# Altium PCB OSD19001_BRK_X2.PcbDoc (part 2 of 2)
Units mil, origin at the board's own origin, x right, y up, seen from the top; angles counter-clockwise.
Board outline 1800 x 3000 mil, 4 copper layers (Top Layer, L2 PLANE, L3 PLANE, Bottom Layer), stack 59.2 mil thick; 162 components, 155 nets, 549 pads, 163 vias.
Unrouted connection lines stored in the file: 111.
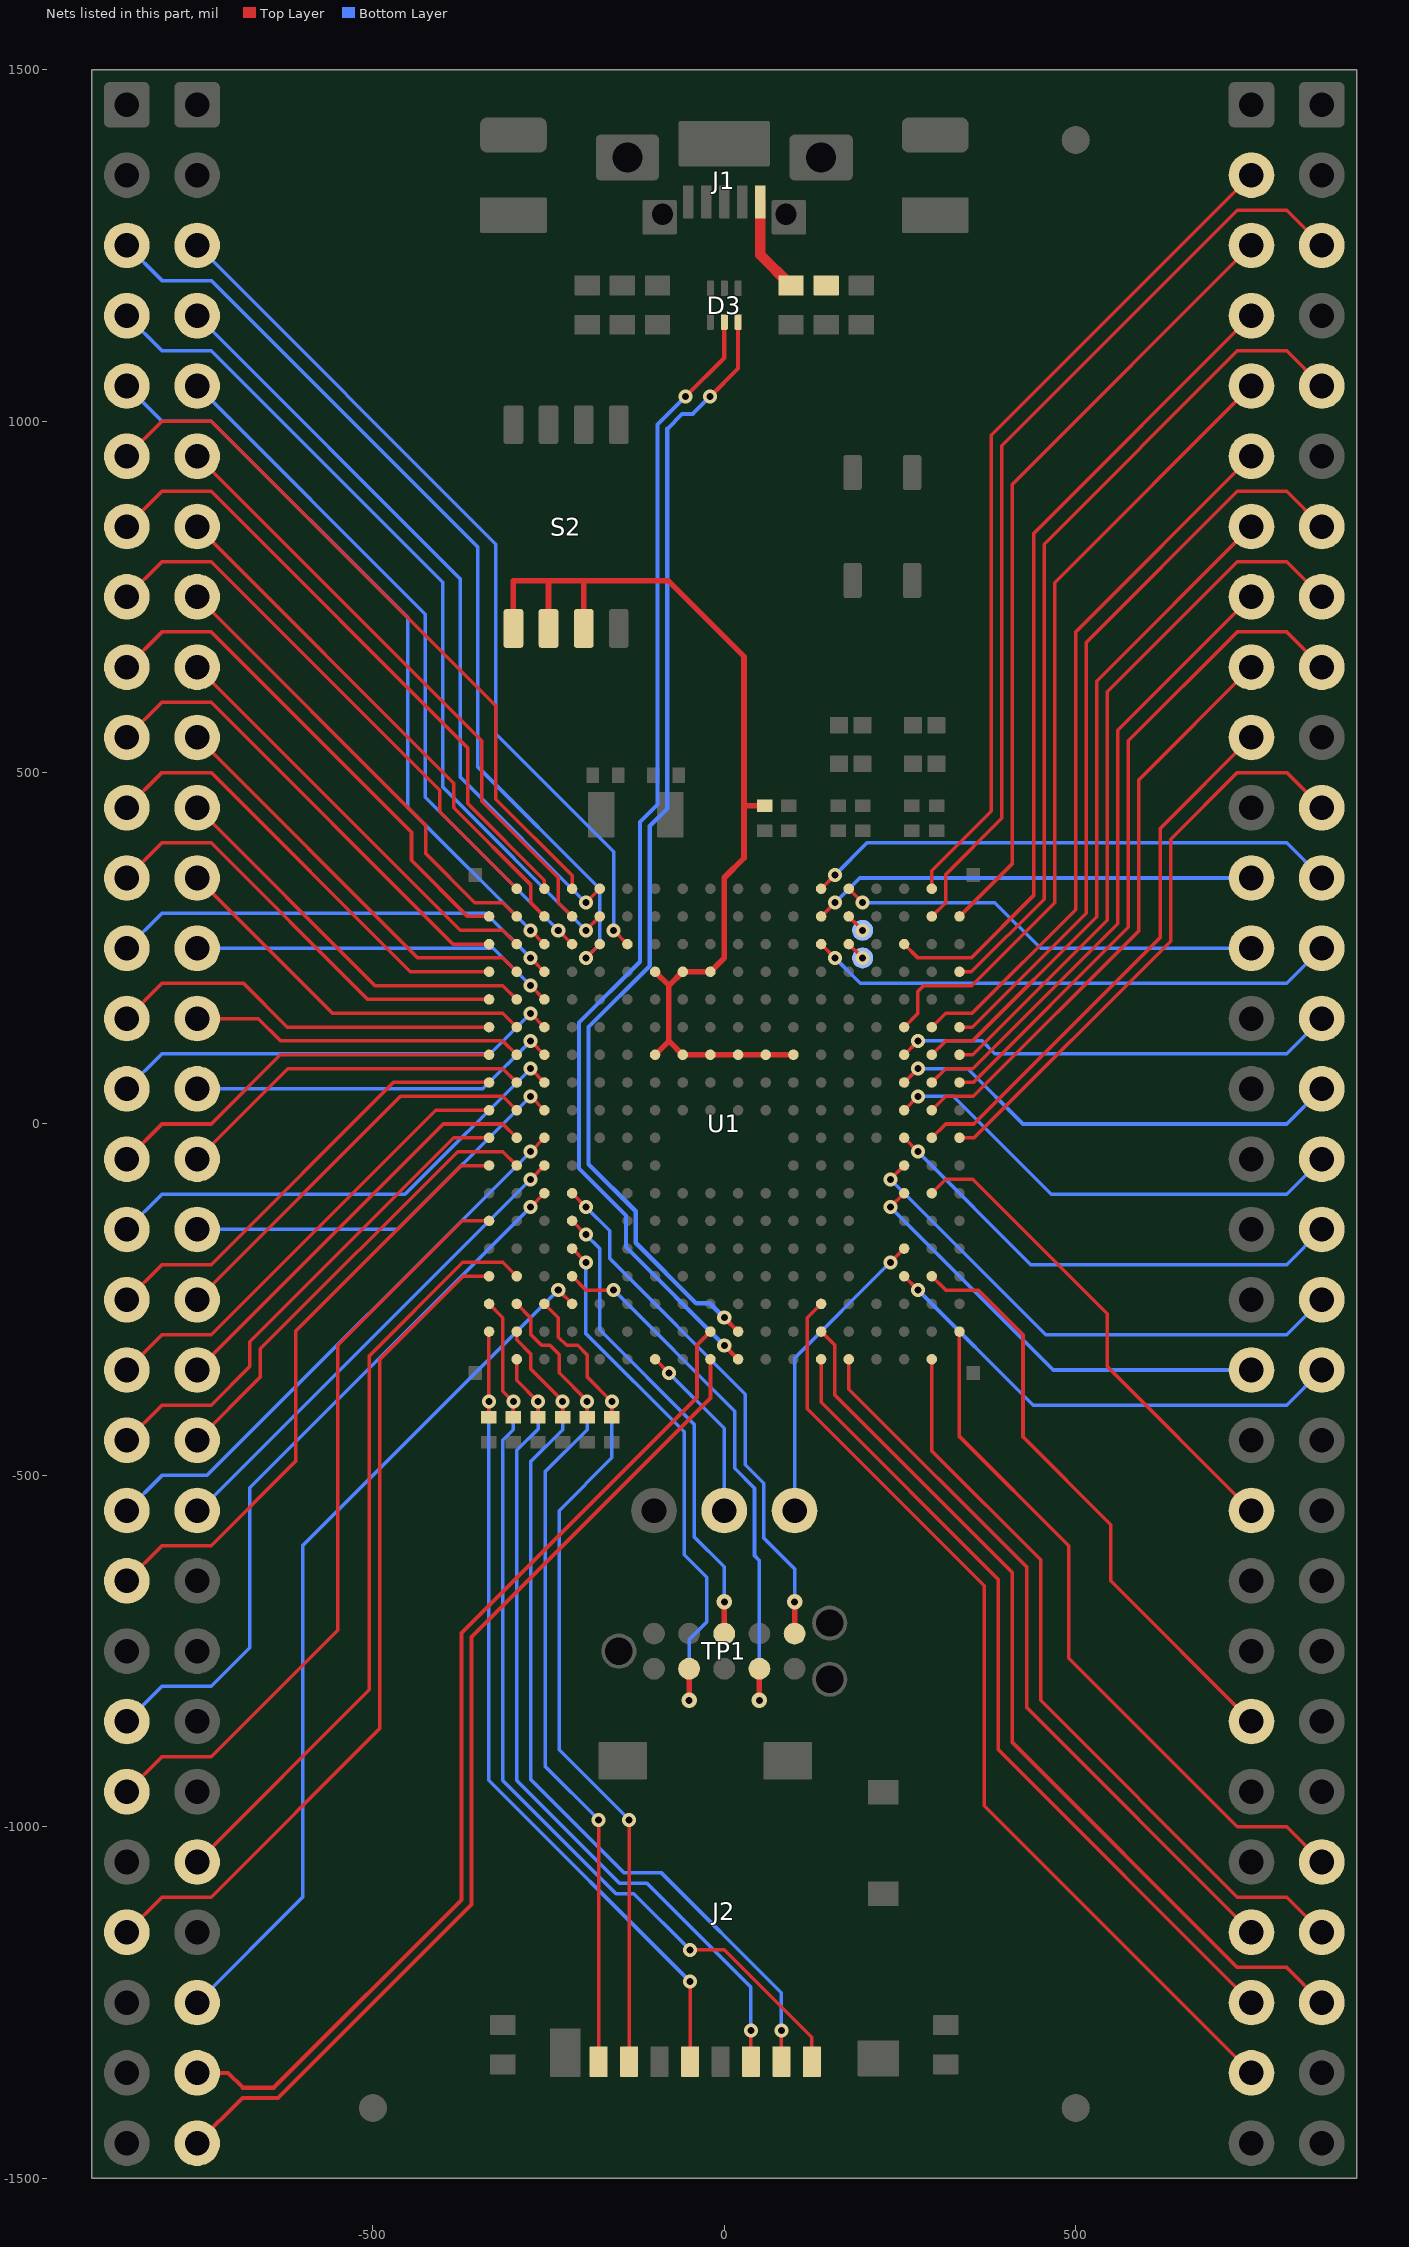
[diagram p4: the nets of this part, all layers, seen from the top]

## Via types
v1: diameter 20, hole 10, Top Layer to Bottom Layer, 130 vias
v2: diameter 25, hole 15, Top Layer to Bottom Layer, 26 vias
v3: diameter 22, hole 10, Top Layer to Bottom Layer, 7 vias

## Nets (pads, with @x,y where several pads share a name; then routed paths per layer and width w, separated by ;. In a path a pad name is that pad's centre, name@x,y a point inside that pad or via, vN(x,y) a via of type N, cw(c..) or ccw(c..) an arc to the next point about the centre after c; other vN are vias at no path point) (continued)
PB15: PA25.1 U1.V13 | length 1089
  Top Layer w5: PA25.1@-850,-950 -800,-900 -730,-900 -550,-720 -550,-315 -372.8,-137.8 U1.V13@-334.65,-137.8
PC0: PD26.1 U1.A17 | length 1009.2
  Top Layer w5: U1.A17@334.65,-295.28 334.65,-444.65 490,-600 490,-760 730,-1000 800,-1000 PD26.1@850,-1050
PC1: PC24.1 U1.B15 | length 848.9
  Top Layer w5: U1.B15@295.28,-216.54 314.96,-236.22 361.22,-236.22 425,-300 425,-445 550,-570 550,-650 PC24.1@750,-850
PC2: PD14.1 U1.C7 | length 630.5
  Top Layer w5: U1.C7@255.91,98.43 v1(275.59,118.11)
  Bottom Layer w5: v1(275.59,118.11) 366.89,118.11 385,100 800,100 PD14.1@850,150
PC3: PC06.1 U1.B6 | length 1022.5
  Top Layer w5: U1.B6@295.28,137.8 314.96,157.48 352.48,157.48 500,305 500,700 PC06.1@750,950
PC4: PC21.1 U1.B12 | length 702
  Top Layer w5: U1.B12@295.28,-98.43 314.96,-78.74 353.74,-78.74 545,-270 545,-345 PC21.1@750,-550
PC5: PC19.1 U1.C12 | length 637.7
  Top Layer w5: v1(236.22,-118.11) U1.C12@255.91,-98.43
  Bottom Layer w5: v1(236.22,-118.11) 468.11,-350 PC19.1@750,-350
PC7: PB28.1 U1.R16 | length 1254.4
  Top Layer w5: v1(-236.22,-236.22) U1.R16@-216.54,-255.91
  Bottom Layer w5: PB28.1@-750,-1250 -600,-1100 -600,-600 v1(-236.22,-236.22)
PD0: PA22.1 U1.V11 | length 868.5
  Top Layer w5: PA22.1@-850,-650 -800,-600 -730,-600 -610,-480 -610,-295 -374.06,-59.06 U1.V11@-334.65,-59.06
PD1: PB20.1 U1.U11 | length 656.4
  Top Layer w5: PB20.1@-750,-450 -660,-360 -660,-320 -379.37,-39.37 -314.96,-39.37 U1.U11@-295.28,-59.06
PD3: PB21.1 U1.T11 | length 694.3
  Top Layer w5: v1(-275.59,-78.74) U1.T11@-255.91,-59.06
  Bottom Layer w5: PB21.1@-746.85,-550 v1(-275.59,-78.74)
PD4: PA20.1 U1.V10 | length 714.1
  Top Layer w5: PA20.1@-850,-450 -800,-400 -730,-400 -675,-345 -675,-310 -384.68,-19.69 U1.V10@-334.65,-19.69
PD5: PB19.1 U1.U10 | length 607.9
  Top Layer w5: PB19.1@-750,-350 -400,0 -314.96,0 U1.U10@-295.28,-19.69
PD6: PA21.1 U1.T10 | length 813.8
  Top Layer w5: v1(-275.59,-39.37) U1.T10@-255.91,-19.69
  Bottom Layer w5: PA21.1@-850,-550 -800,-500 -736.22,-500 v1(-275.59,-39.37)
PD7: PB18.1 U1.U9 | length 582.7
  Top Layer w5: PB18.1@-750,-250 -460.63,39.37 -314.96,39.37 U1.U9@-295.28,19.69
PD8: PD03.1 U1.B2 | length 1325.5
  Top Layer w5: U1.B2@295.28,295.28 314.96,314.96 314.96,354.96 395,435 395,965 730,1300 800,1300 PD03.1@850,1250
PD9: PC02.1 U1.B1 | length 1203.7
  Top Layer w5: U1.B1@295.28,334.65 295.28,360.28 380,445 380,980 PC02.1@750,1350
PD10: PA14.1 U1.V6 | length 561.8
  Top Layer w5: PA14.1@-850,150 -800,200 -684,200 -621.8,137.8 U1.V6@-334.65,137.8
PD11: PC27.1 U1.E18 | length 1052.6
  Top Layer w5: U1.E18@177.17,-334.65 177.17,-377.17 430,-630 430,-830 PC27.1@750,-1150
PD12: PC29.1 U1.F16 | length 1364
  Top Layer w5: U1.F16@137.8,-255.91 118.11,-275.59 118.11,-405.11 370,-657 370,-970 PC29.1@750,-1350
PD13: PD28.1 U1.F17 | length 1290.7
  Top Layer w5: U1.F17@137.8,-295.28 157.48,-314.96 157.48,-385.83 410,-638.35 410,-880 730,-1200 800,-1200 PD28.1@850,-1250
PD14: PC04.1 U1.C3 | length 1182.4
  Top Layer w5: U1.C3@255.91,255.91 275.59,236.22 351.22,236.22 440,325 440,840 PC04.1@750,1150
PD15: PC03.1 U1.A2 | length 1126.8
  Top Layer w5: U1.A2@334.65,295.28 410,370.63 410,910 PC03.1@750,1250
PE0: PB14.1 U1.U7 | length 476.1
  Top Layer w5: PB14.1@-750,150 -663,150 -631.11,118.11 -314.96,118.11 U1.U7@-295.28,98.43
PE1: PB15.1 U1.T7 | length 530.5
  Top Layer w5: v1(-275.59,118.11) U1.T7@-255.91,98.43
  Bottom Layer w5: PB15.1@-750,50 -343.7,50 v1(-275.59,118.11)
PE2: PD07.1 U1.A6 | length 1077.3
  Top Layer w5: U1.A6@334.65,137.8 352.8,137.8 515,300 515,685 730,900 800,900 PD07.1@850,850
PE3: PA24.1 U1.T12 | length 1038.7
  Top Layer w5: v1(-275.59,-118.11) U1.T12@-255.91,-98.43
  Bottom Layer w5: PA24.1@-850,-850 -800,-800 -730,-800 -675,-745 -675,-517.52 v1(-275.59,-118.11)
PE5: PA27.1 U1.V15 | length 1209.5
  Top Layer w5: PA27.1@-850,-1150 -800,-1100 -730,-1100 -490,-860 -490,-335 -371.54,-216.54 U1.V15@-334.65,-216.54
PE6: PB17.1 U1.T9 | length 580.7
  Top Layer w5: v1(-275.59,39.37) U1.T9@-255.91,19.69
  Bottom Layer w5: PB17.1@-750,-150 -464.96,-150 v1(-275.59,39.37)
PE11: PA12.1 U1.V5 | length 628.4
  Top Layer w5: PA12.1@-850,350 -800,400 -730,400 -507.17,177.17 U1.V5@-334.65,177.17
PE12: PB11.1 U1.U5 | length 567.7
  Top Layer w5: PB11.1@-750,450 -496.85,196.85 -314.96,196.85 U1.U5@-295.28,177.17
PE13: PB13.1 U1.T5 | length 524.3
  Top Layer w5: v1(-275.59,196.85) U1.T5@-255.91,177.17
  Bottom Layer w5: PB13.1@-750,250 -328.74,250 v1(-275.59,196.85)
PE14: PA11.1 U1.V4 | length 653.5
  Top Layer w5: PA11.1@-850,450 -800,500 -730,500 -446.54,216.54 U1.V4@-334.65,216.54
PE15: PB10.1 U1.U4 | length 592.8
  Top Layer w5: PB10.1@-750,550 -436.22,236.22 -314.96,236.22 U1.U4@-295.28,216.54
PF0: PB16.1 U1.U8 | length 516.2
  Top Layer w5: PB16.1@-750,-50 -621.26,78.74 -314.96,78.74 U1.U8@-295.28,59.06
PF1: PA18.1 U1.V8 | length 643.4
  Top Layer w5: PA18.1@-850,-250 -800,-200 -730,-200 -470.94,59.06 U1.V8@-334.65,59.06
PF3: PC05.1 U1.C6 | length 1156.9
  Top Layer w5: U1.C6@255.91,137.8 275.59,157.48 275.59,188.98 283.46,196.85 351.85,196.85 470,315 470,770 PC05.1@750,1050
PF4: PA16.1 U1.V7 | length 576.8
  Top Layer w5: PA16.1@-850,-50 -800,0 -730,0 -631.57,98.43 U1.V7@-334.65,98.43
PF5: PA17.1 U1.T8 | length 697
  Top Layer w5: v1(-275.59,78.74) U1.T8@-255.91,59.06
  Bottom Layer w5: PA17.1@-850,-150 -800,-100 -454.33,-100 v1(-275.59,78.74)
PF6: PC28.1 U1.F18 | length 1168.9
  Top Layer w5: U1.F18@137.8,-334.65 137.8,-395.8 390,-648 390,-890 PC28.1@750,-1250
PF11: PD27.1 U1.B18 | length 1086.1
  Top Layer w5: U1.B18@295.28,-334.65 295.28,-465.28 450,-620 450,-820 730,-1100 800,-1100 PD27.1@850,-1150
PF12: PD18.1 U1.C11 | length 754
  Top Layer w5: v1(236.22,-78.74) U1.C11@255.91,-59.06
  Bottom Layer w5: v1(236.22,-78.74) 457.48,-300 800,-300 PD18.1@850,-250
PF13: PD11.1 U1.A10 | length 836.3
  Top Layer w5: U1.A10@334.65,-19.69 355.31,-19.69 635,260 635,405 730,500 800,500 PD11.1@850,450
PF14: PC10.1 U1.B10 | length 781.5
  Top Layer w5: U1.B10@295.28,-19.69 314.96,0 355,0 620,265 620,420 PC10.1@750,550
PF15: PD17.1 U1.C10 | length 689.5
  Top Layer w5: U1.C10@255.91,-19.69 v1(275.59,-39.37)
  Bottom Layer w5: v1(275.59,-39.37) 436.22,-200 800,-200 PD17.1@850,-150
PG0: PD15.1 U1.C8 | length 655.6
  Top Layer w5: U1.C8@255.91,59.06 v1(275.59,78.74)
  Bottom Layer w5: v1(275.59,78.74) 346.26,78.74 425,0 800,0 PD15.1@850,50
PG1: PC08.1 U1.B8 | length 902
  Top Layer w5: U1.B8@295.28,59.06 314.96,78.74 353.74,78.74 560,285 560,560 PC08.1@750,750
PG2: PD09.1 U1.A8 | length 956.8
  Top Layer w5: U1.A8@334.65,59.06 354.06,59.06 575,280 575,545 730,700 800,700 PD09.1@850,650
PG3: PD16.1 U1.C9 | length 680.7
  Top Layer w5: U1.C9@255.91,19.69 v1(275.59,39.37)
  Bottom Layer w5: v1(275.59,39.37) 325.63,39.37 465,-100 800,-100 PD16.1@850,-50
PG4: PC09.1 U1.B9 | length 841.8
  Top Layer w5: U1.B9@295.28,19.69 314.96,39.37 354.37,39.37 590,275 590,490 PC09.1@750,650
PG5: PD19.1 U1.C15 | length 690.8
  Top Layer w5: U1.C15@255.91,-216.54 v1(275.59,-236.22)
  Bottom Layer w5: v1(275.59,-236.22) 439.37,-400 800,-400 PD19.1@850,-350
PG6: PB26.1 U1.U15 | length 1094.5
  Top Layer w5: PB26.1@-750,-1050 -505,-805 -505,-330 -371.85,-196.85 -314.96,-196.85 U1.U15@-295.28,-216.54
PG12: PD05.1 U1.A4 | length 1197.8
  Top Layer w5: U1.A4@334.65,216.54 351.54,216.54 455,320 455,825 730,1100 800,1100 PD05.1@850,1050
PG13: PC07.1 U1.B7 | length 962.3
  Top Layer w5: U1.B7@295.28,98.43 314.96,118.11 353.11,118.11 530,295 530,630 PC07.1@750,850
PG14: PD08.1 U1.A7 | length 1017
  Top Layer w5: U1.A7@334.65,98.43 353.43,98.43 545,290 545,615 730,800 800,800 PD08.1@850,750
PG15: PA19.1 U1.V9 | length 668.5
  Top Layer w5: PA19.1@-850,-350 -800,-300 -730,-300 -410.32,19.68 U1.V9@-334.65,19.69
PH4: PB12.1 U1.U6 | length 542.6
  Top Layer w5: PB12.1@-750,350 -557.48,157.48 -314.96,157.48 U1.U6@-295.28,137.8
PH5: PA15.1 U1.T6 | length 646.8
  Top Layer w5: v1(-275.59,157.48) U1.T6@-255.91,137.8
  Bottom Layer w5: PA15.1@-850,50 -800,100 -333.07,100 v1(-275.59,157.48)
PH8: PA13.1 U1.T4 | length 649.4
  Top Layer w5: v1(-275.59,236.22) U1.T4@-255.91,216.54
  Bottom Layer w5: PA13.1@-850,250 -800,300 -339.37,300 v1(-275.59,236.22)
PH9: PA10.1 U1.V3 | length 678.6
  Top Layer w5: PA10.1@-850,550 -800,600 -730,600 -385.91,255.91 U1.V3@-334.65,255.91
PH10: PB09.1 U1.U3 | length 618
  Top Layer w5: PB09.1@-750,650 -375.59,275.59 -314.96,275.59 U1.U3@-295.28,255.91
PH11: PA09.1 U1.V2 | length 727.1
  Top Layer w5: PA09.1@-850,650 -800,700 -730,700 -445,415 -445,375 -365.28,295.28 U1.V2@-334.65,295.28
PH12: PB08.1 U1.U2 | length 666.5
  Top Layer w5: PB08.1@-750,750 -425,425 -425,385 -354.96,314.96 -314.96,314.96 U1.U2@-295.28,295.28
PH13: PA08.1 U1.U1 | length 786.1
  Top Layer w5: PA08.1@-850,750 -800,800 -730,800 -405,475 -405,444.37 U1.U1@-295.28,334.65
PH14: PA07.1 U1.T1 | length 902.4
  Top Layer w5: PA07.1@-850,850 -800,900 -730,900 -365,535 -365,456 -255.91,346.91 U1.T1@-255.91,334.65
PH15: PB07.1 U1.T2 | length 759.4
  Top Layer w5: PB07.1@-750,850 -385,485 -385,450 -275,340 -275,314.37 U1.T2@-255.91,295.28
PI0: PA05.1 U1.T3 | length 1081.2
  Top Layer w5: v1(-275.59,275.59) U1.T3@-255.91,255.91
  Bottom Layer w5: PA05.1@-850,1050 -800,1000 -730,1000 -450,720 -450,450 v1(-275.59,275.59)
PI1: PA06.1 U1.R1 | length 1018.7
  Top Layer w5: PA06.1@-850,950 -800,1000 -730,1000 -325,595 -325,462 -216.54,353.54 U1.R1@-216.54,334.65
PI2: PB06.1 U1.R2 | length 875.7
  Top Layer w5: PB06.1@-750,950 -345,545 -345,459 -236.22,350.22 -236.22,314.96 U1.R2@-216.54,295.28
PI3: PB05.1 U1.R3 | length 1015.1
  Top Layer w5: v1(-236.22,275.59) U1.R3@-216.54,255.91
  Bottom Layer w5: PB05.1@-750,1050 -425.32,725.31 -425.32,464.68 v1(-236.22,275.59)
PI4: PB04.1 U1.P1 | length 1092
  Top Layer w5: v1(-196.85,314.96) U1.P1@-177.17,334.65
  Bottom Layer w5: PB04.1@-750,1150 -375.94,775.94 -375.94,494.06 v1(-196.85,314.96)
PI5: PA04.1 U1.P2 | length 1213.8
  Top Layer w5: v1(-196.85,275.59) U1.P2@-177.17,295.28
  Bottom Layer w5: PA04.1@-850,1150 -800,1100 -730,1100 -400.63,770.63 -400.63,479.37 v1(-196.85,275.59)
PI6: PA03.1 U1.P3 | length 1369.5
  Top Layer w5: v1(-196.85,236.22) U1.P3@-177.17,255.91
  Bottom Layer w5: PA03.1@-850,1250 -800,1200 -730,1200 -350.39,820.39 -350.39,507.87 -177.17,334.65 -177.17,255.91 v1(-196.85,236.22)
PI7: PB03.1 U1.N3 | length 1247.7
  Top Layer w5: v1(-157.48,275.59) U1.N3@-137.8,255.91
  Bottom Layer w5: PB03.1@-750,1250 -325,825 -325,555 -157.48,387.48 v1(-157.48,275.59)
PZ0: PD12.1 U1.F1 | length 760
  Top Layer w5: U1.F1@137.8,334.65 v1(157.48,354.33)
  Bottom Layer w5: v1(157.48,354.33) 203.15,400 800,400 PD12.1@850,350
PZ1: PC12.1 U1.F2 | length 634.9
  Top Layer w5: U1.F2@137.8,295.28 v1(157.48,314.96)
  Bottom Layer w5: v1(157.48,314.96) 192.52,350 PC12.1@750,350
PZ2: PD13.1 U1.F3 | length 756.1
  Top Layer w5: U1.F3@137.8,255.91 v1(157.48,236.22)
  Bottom Layer w5: v1(157.48,236.22) 193.7,200 800,200 PD13.1@850,250
PZ3: PC13.1 U1.E1 | length 607.9
  Top Layer w5: U1.E1@177.17,334.65 v1(196.85,314.96)
  Bottom Layer w5: v1(196.85,314.96) 385.04,314.96 450,250 PC13.1@750,250
PZ4: PZ4.1 U1.E2 | length 27.8
  Top Layer w5: U1.E2@177.17,295.28 v1(196.85,275.59)
PZ5: PZ5.1 U1.E3 | length 27.8
  Top Layer w5: U1.E3@177.17,255.91 v1(196.85,236.22)
SDMMC1_CK: J2.5 R5.1 U1.V17 | length 1179.5
  Top Layer w5: R5.1@-335,-417 v1(-335,-395) -335,-295.63 U1.V17@-334.65,-295.28 ; J2.5@-48.72,-1334.07 v1(-48.72,-1220)
  Bottom Layer w5: v1(-335,-395) -335,-933.72 v1(-48.72,-1220)
SDMMC1_CMD: J2.3 R6.1 U1.U18 | length 1207.1
  Top Layer w5: U1.U18@-295.28,-334.65 -295.28,-364.72 v1(-265,-395) R6.1@-265,-417 ; J2.3@37.89,-1334.07 v1(37.89,-1290)
  Bottom Layer w5: v1(-265,-395) -265,-434.29 -295,-464.29 -295,-934 -149,-1080 -110,-1080 37.89,-1227.89 v1(37.89,-1290)
SDMMC1_D0: J2.7 R1.1 U1.T16 | length 1221.5
  Top Layer w5: U1.T16@-255.91,-255.91 -236.22,-275.59 -236.22,-303.15 -224.37,-315 -208.62,-315 -195,-328.62 -195,-360 v1(-160,-395) R1.1@-160,-417 ; J2.7@-135.33,-1334.07 v1(-135.33,-990)
  Bottom Layer w5: v1(-160,-395) -160,-475 -235,-550 -235,-890.33 v1(-135.33,-990)
SDMMC1_D1: J2.8 R2.1 U1.U16 | length 1205.2
  Top Layer w5: U1.U16@-295.28,-255.91 -275,-276.18 -275,-300 -260,-315 -247.99,-315 -235,-327.99 -235,-354.06 -195,-394.06 v1(-195,-395) R2.1@-195,-417 ; J2.8@-178.64,-1334.07 v1(-178.64,-990)
  Bottom Layer w5: v1(-195,-395) -195,-435 -255,-495 -255,-913.64 v1(-178.64,-990)
SDMMC1_D2: J2.1 R3.1 U1.V16 | length 1347
  Top Layer w5: U1.V16@-334.65,-255.91 -315,-275.55 -315,-380 v1(-300,-395) R3.1@-300,-417 ; v1@-50,-1175 v1@-49.36,-1174.36 ; v1(-48.72,-1175) 0,-1175 124.51,-1299.51 J2.1@124.51,-1334.07
  Bottom Layer w5: v1(-300,-395) -300,-435 -315,-450 -315,-934 -154,-1095 -128.72,-1095 v1(-48.72,-1175)
SDMMC1_D3: J2.2 R4.1 U1.U17 | length 1285.1
  Top Layer w5: U1.U17@-295.28,-295.28 -295.28,-307.09 -275,-327.36 -275,-349.06 -230,-394.06 v1(-230,-395) R4.1@-230,-417 ; J2.2@81.2,-1334.07 v1(81.2,-1290)
  Bottom Layer w5: v1(-230,-395) -230,-435 -275,-480 -275,-933 -143,-1065 -90,-1065 81.2,-1236.2 v1(81.2,-1290)
SWCLK/TCK: TP1.4 U1.R15 | length 781.9
  Top Layer w5: U1.R15@-216.54,-216.54 -196.85,-236.22 v1(-157.48,-236.22)
  Top Layer w8: v3(50,-820) TP1.4@50,-775
  Bottom Layer w5: v1(-157.48,-236.22) 15,-408.7 15,-490 43,-518 43,-614 50,-621 v3(50,-820)
SWDIO/TMS: TP1.2 U1.R14 | length 777.5
  Top Layer w5: U1.R14@-216.54,-177.17 v1(-196.85,-196.85)
  Top Layer w8: v3(-50,-820) TP1.2@-50,-775
  Bottom Layer w5: v1(-196.85,-196.85) -196.85,-298.15 -57,-438 -57,-613 -25,-645 -25,-708.46 -50,-733.46 v3(-50,-820)
SWO/TDO: TP1.6 U1.R12 | length 757.7
  Top Layer w5: U1.R12@-216.54,-98.43 v1(-196.85,-118.11)
  Top Layer w8: TP1.6@100,-725 v3(100,-680)
  Bottom Layer w5: v1(-196.85,-118.11) -163,-151.96 -163,-191.33 30,-384.33 30,-485 56,-511 56,-589 100,-633 v3(100,-680)
TDI: TP1.8 U1.R13 | length 676.9
  Top Layer w5: U1.R13@-216.54,-137.8 v1(-196.85,-157.48)
  Top Layer w8: TP1.8@0,-725 v3(0,-680)
  Bottom Layer w5: v1(-196.85,-157.48) -177.17,-177.17 -177.17,-292.83 -43,-427 -43,-587 0,-630 v3(0,-680)
UART4_RX: PRXD.1 U1.M18 | length 256.1
  Top Layer w5: U1.M18@-98.43,-334.65 v1(-78.74,-354.33)
  Bottom Layer w5: v1(-78.74,-354.33) 0,-433.07 PRXD.1@0,-550
UART4_TX: PTXD.1 U1.C14 | length 437.4
  Top Layer w5: v1(236.22,-196.85) U1.C14@255.91,-177.17
  Bottom Layer w5: PTXD.1@100,-550 100,-333.07 v1(236.22,-196.85)
USB1_D_N: PB30.1 U1.K18 | length 1447.6
  Top Layer w6: PB30.1@-750,-1450 -685.55,-1385.55 -634.75,-1385.55 -359.69,-1110.5 -359.69,-729.68 -19.69,-389.67 U1.K18@-19.69,-334.65
USB1_D_P: PB29.1 U1.K17 | length 1450.8
  Top Layer w6: PB29.1@-750,-1350 -705.97,-1350 -684.97,-1371 -641,-1371 -374,-1104 -374,-724 -39,-389 -39,-314.59 U1.K17@-19.69,-295.28
USB2_D_N: D3.6 U1.J17 | length 1628.8
  Top Layer w6: v1(-20,1035) 19.68,1074.68 D3.6@19.68,1141.38 ; v1(0,-275.59) U1.J17@19.69,-295.28
  Bottom Layer w6: v1@-23,1032 -45,1010 -60,1010 -81,989 -81,449 -106,424 -106,225 -193,138 -193,-57.2 -126,-124.2 -126,-169 -40,-255 -20.59,-255 v1(0,-275.59)
USB2_D_P: D3.5 U1.J18 | length 1654.9
  Top Layer w6: v1(-55,1035) 0,1090 D3.5@0,1140.98 ; v1(0,-314.96) U1.J18@19.69,-334.65
  Bottom Layer w6: v1(-55,1035) -95,995 -95,454.8 -120,429.8 -120,230.8 -206.54,144.26 -206.54,-63.46 -140,-130 -140,-174.96 v1(0,-314.96)
VDDI: R7.2 S2.1 S2.2 S2.3 U1.G7 U1.H7 U1.J7 U1.K4 U1.K7 U1.L4 U1.L7 U1.M4 U1.M7 | length 1461.2
  Top Layer w8: S2.1@-300,705 -300,773 -250,773 ; S2.2@-250,705 -250,773 ; S2.3@-200,705 -200,773 ; U1.M7@-98.43,98.43 -78.74,118.11 ; U1.M4@-98.43,216.54 -78.74,196.85 ; R7.2@57.31,453 28,453 ; U1.G7@98.43,98.43 U1.H7@59.06,98.43 U1.J7@19.69,98.43 U1.K7@-19.69,98.43 U1.L7@-59.06,98.43 -78.74,118.11 ; -250,773 -200,773 ; -200,773 -80,773 28,665 28,453 ; -78.74,118.11 -78.74,196.85 ; -78.74,196.85 U1.L4@-59.06,216.54 U1.K4@-19.69,216.54 0,236.22 0,350.39 28,378.39 28,453
VWALLP: C5.2 J1.1 L1.1 | length 137.2
  Top Layer w15: J1.1@51.18,1312.01 51.18,1236.82 C5.2@95,1193
pads on no net: FID1.1 FID2.1 FID3.1 TP1.0 TP1.5 TP1.7 U1.0 U1.A3 U1.B4 U1.B5 U1.B13 U1.C4 U1.C5 U1.C13 U1.C18 U1.D5 U1.D6 U1.D7 U1.D8 U1.D9 U1.D10 U1.D16 U1.D17 U1.D18 U1.E16 U1.E17 U1.G8 U1.G16 U1.G17 U1.G18 U1.H4 U1.H12 U1.H16 U1.J2 U1.J4 U1.J12 U1.K6 U1.K8 U1.K9 U1.K12 U1.L3 U1.L6 U1.L12 U1.L16 U1.L17 U1.L18 U1.M6 U1.M16 U1.M17 U1.N4 U1.N16 U1.N17 U1.N18 U1.P9 U1.P10 U1.P16 U1.P17 U1.P18 U1.R4 U1.R5 U1.R6 U1.R7 U1.R8 U1.R9 U1.R10 U1.R17 U1.R18 U1.T17 U1.T18
copper on no net: | length 0

## Polygon pours and split planes (outlines as drawn)
GND on Top Layer "Top Layer-GND" (solid, pour order 0): -233,360 -15.75,360 -15.75,550 -233,550
GND on L2 PLANE (split plane): 884.93,-1484.93 -884.93,-1484.93 -884.93,1484.93 884.93,1484.93
+3.3V on L3 PLANE (split plane): 884.93,-1484.93 -884.93,-1484.93 -884.93,1389.91 -704.18,1389.91 -342.13,1027.87 -340.04,1026.26 -337.61,1025.26 -335,1024.91 -5.09,1024.91 -5.09,349.33 -4.74,346.72 -3.73,344.29 -2.13,342.2 68.65,271.41 68.65,167.57 -118.11,167.57 -120.72,167.22 -123.15,166.22 -125.24,164.61 -126.85,162.52 -127.85,160.09 -128.2,157.48 -128.2,0 -127.85,-2.61 -126.85,-5.04 -125.24,-7.13 -123.15,-8.74 -120.72,-9.74 -118.11,-10.09 236.22,-10.09 238.83,-9.74 241.26,-8.74 243.35,-7.13 244.96,-5.04 245.96,-2.61 246.31,0 246.31,622.04 382.13,757.87 383.74,759.96 384.74,762.39 385.09,765 385.09,1484.93 884.93,1484.93
+VIN on L3 PLANE (split plane): 364.91,769.18 229.09,633.35 227.49,631.26 226.48,628.83 226.13,626.22 226.13,10.09 -108.02,10.09 -108.02,147.39 78.74,147.39 81.35,147.74 83.78,148.75 85.87,150.35 87.48,152.44 88.07,153.86 88.48,154.87 88.83,157.48 88.83,275.59 88.48,278.2 87.98,279.42 87.48,280.63 85.87,282.72 15.09,353.51 15.09,1035 14.74,1037.61 13.74,1040.04 12.13,1042.13 10.04,1043.74 7.61,1044.74 5,1045.09 -330.82,1045.09 -692.87,1407.13 -694.96,1408.74 -697.39,1409.74 -700,1410.09 -884.93,1410.09 -884.93,1484.93 364.91,1484.93

## Other copper
Top Layer:
  rectangle net NetC10_2: -169,1175 -67,1287
  region net +VIN: -229,1095 -229,1325 -370,1325 -370,1095
  region net +VIN: -171,1155 -370,1155 -370,1095 -171,1095
  rectangle net +VIN: 121,1095 370,1155
  region net +VIN: 370,1095 370,1325 229,1325 229,1095
  rectangle net VWALLP: 43.7,1175 168.7,1245
  rectangle net GND: -58.7,1095 -13,1276
  region net NetC10_2: -67,1259 -67,1430 -190,1430 -190,1259
  region net NetC10_2: 190,1259 190,1430 67,1430 67,1259
  region net NetC10_2: 116,1430 -140,1430 -140,1350 116,1350
  text ".layer_Name" at -1007.67,2144.26 h125
Bottom Layer:
  text ".layer_Name" at -1065,1820 h125
L2 PLANE (plane layer: these items are gaps in the copper):
  text ".Layer_Name" at -1002.5,2034.5 h125
L3 PLANE (plane layer: these items are gaps in the copper):
  lines w20: -900,1400 -700,1400 -335,1035 5,1035 5,349.33 78.74,275.59 78.74,157.48 ; 375,1500 375,765 236.22,626.22 236.22,0 -118.11,0 -118.11,157.48 78.74,157.48 ; 78.74,157.48 78.74,157.48
  text ".Layer_Name" at -997.5,1924.5 h125

## Silkscreen, mask and mechanical layers (free items; w line width, h text height)
Top Overlay:
  drawing of 2511 lines, arcs and shapes, not listed
  text ".layer_Name" at -285,2019.5 h125
  text "A" at -850,1340 h45
  text "B" at -750,1340 h45
  text "C" at 650,1340 h45
  text "D" at 750,1340 h45
  text "RESET" at 150,736 h45 r90
  text "BOOT" at -355,735 h45 r90
  text "1" at -235,656 h45 r90
  text "0" at -286,653 h45 r90
  text "2" at -185,652 h45 r90
  text "WP" at -135,608 h45 r90
  text "OSD32MP1-BRK              VER 1" at 450,-355 h55 r90
  text "OCTAVOSYSTEMS.COM" at 520,-355 h60 r90
  text "GND" at -85,-500 h45 r90
  text "RX" at 15,-500 h45 r90
  text "TX" at 115,-500 h45 r90
  text "ST-LINK" at -80,-660 h45
  text "A" at -850,-1450 h45
  text "B" at -750,-1450 h45
  text "C" at 650,-1450 h45
  text "D" at 750,-1450 h45
Bottom Overlay:
  lines w6: -700,-1490 -700,1490 ; -700,-1400 -350,-1400 ; -700,-1300 -350,-1300 ; -700,-1200 -350,-1200 ; -700,-1100 -350,-1100 ; -700,-1000 -350,-1000 ; -700,-900 -350,-900 ; -700,-800 -350,-800 ; -700,-700 -350,-700 ; -700,-600 -350,-600 ; -700,-500 -350,-500 ; -700,-400 -350,-400 ; -700,-300 -350,-300 ; -700,-200 -350,-200 ; -700,-100 -350,-100 ; -700,0 -350,0 ; -700,100 -350,100 ; -700,200 -350,200 ; -700,300 -350,300 ; -700,400 -350,400 ; -700,500 -350,500 ; -700,600 -350,600 ; -700,700 -350,700 ; -700,800 -350,800 ; -700,900 -350,900 ; -700,1000 -350,1000 ; -700,1100 -350,1100 ; -700,1200 -350,1200 ; -700,1300 -350,1300 ; -700,1400 -350,1400 ; -525,-1490 -525,1490 ; -350,-1490 -350,1490 ; 350,-1490 350,1490 ; 350,-1400 700,-1400 ; 350,-1300 700,-1300 ; 350,-1200 700,-1200 ; 350,-1100 700,-1100 ; 350,-1000 700,-1000 ; 350,-900 700,-900 ; 350,-800 700,-800 ; 350,-700 700,-700 ; 350,-600 700,-600 ; 350,-500 700,-500 ; 350,-400 700,-400 ; 350,-300 700,-300 ; 350,-200 700,-200 ; 350,-100 700,-100 ; 350,0 700,0 ; 350,100 700,100 ; 350,200 700,200 ; 350,300 700,300 ; 350,400 700,400 ; 350,500 700,500 ; 350,600 700,600 ; 350,700 700,700 ; 350,800 700,800 ; 350,900 700,900 ; 350,1000 700,1000 ; 350,1100 700,1100 ; 350,1200 700,1200 ; 350,1300 700,1300 ; 350,1400 700,1400 ; 365,170 510,170 ; 525,-1490 525,1490 ; 557,1373 668,1373 ; 700,-1490 700,1490
  lines w10: -90.09,-8.92 ccw(c24,-39.49) 107.52,-123 ; -89.52,-7.37 cw(c-120.09,-121.46) -89.52,-235.54 cw(c24.57,-204.97) 108.08,-121.46
  text ".layer_Name" at -385,1905 h125
  text "+VIN" at -525,1435 h45
  text "+VIN" at -350,1435 h45
  text "+3.3V" at 525,1435 h45
  text "+3.3V" at 700,1435 h45
  text "ANA0" at -525,1335 h45
  text "ANA1" at -350,1335 h45
  text "PD9" at 525,1335 h45
  text "RESET" at 700,1334 h40
  text "PI6" at -525,1235 h45
  text "PI7" at -350,1235 h45
  text "PD15" at 525,1235 h45
  text "PD8" at 700,1235 h45
  text "PI5" at -525,1135 h45
  text "PI4" at -350,1135 h45
  text "PD14" at 525,1135 h45
  text "PA14" at 700,1135 h45
  text "PI0" at -525,1035 h45
  text "PI3" at -350,1035 h45
  text "PF3" at 525,1035 h45
  text "PG12" at 700,1035 h45
  text "PI1" at -525,935 h45
  text "PI2" at -350,935 h45
  text "PC3" at 525,935 h45
  text "PA3" at 700,935 h45
  text "PH14" at -525,835 h45
  text "PH15" at -350,835 h45
  text "PG13" at 525,835 h45
  text "PE2" at 700,835 h45
  text "USA" at -45,812.48 h50 r270
  text "PH13" at -525,735 h45
  text "PH12" at -350,735 h45
  text "PG1" at 525,735 h45
  text "PG14" at 700,735 h45
  text "PH11" at -525,635 h45
  text "PH10" at -350,635 h45
  text "PG4" at 525,635 h45
  text "PG2" at 700,635 h45
  text "PH9" at -525,535 h45
  text "PE15" at -350,535 h45
  text "PF14" at 525,535 h45
  text "PB11" at 700,535 h45
  text "PE14" at -525,435 h45
  text "PE12" at -350,435 h45
  text "PB1" at 525,435 h45
  text "PF13" at 700,435 h45
  text "PE11" at -525,335 h45
  text "PH4" at -350,335 h45
  text "PZ1" at 525,335 h45
  text "PZ0" at 700,335 h45
  text "PH8" at -525,235 h45
  text "PE13" at -350,235 h45
  text "PZ3" at 525,235 h45
  text "PZ2" at 700,235 h45
  text "PD10" at -525,135 h45
  text "PE0" at -350,135 h45
  text "PC2" at 700,135 h45
  text "PONKEY" at 525,133 h40
  text "PH5" at -525,35 h45
  text "PE1" at -350,35 h45
  text "+VLDO2" at 525,35 h45
  text "PG0" at 700,35 h45
  text "WWW.ALLIEDCOMPONENTWORKS.COM" at -95,27.48 h50 r270
  text "GAITHERSBURG, MD" at -50,27.48 h50 r270
  text "ALLIED COMPONENT WORKS, LLC" at 0,27.48 h70 r270
  text "DESIGN AND MFG BY" at 70,27.48 h50 r270
  text "PF4" at -525,-65 h45
  text "PF0" at -350,-65 h45
  text "+VBAT" at 525,-65 h45
  text "PG3" at 700,-65 h45
  text "PF5" at -525,-165 h45
  text "PE6" at -350,-165 h45
  text "+VSW" at 525,-165 h45
  text "PF15" at 700,-165 h45
  text "PF1" at -525,-265 h45
  text "PD7" at -350,-265 h45
  text "+VBST" at 525,-265 h45
  text "PF12" at 700,-265 h45
  text "PG15" at -525,-365 h45
  text "PD5" at -350,-365 h45
  text "PC5" at 525,-365 h45
  text "PG5" at 700,-365 h45
  text "PD4" at -525,-465 h45
  text "PD1" at -350,-465 h45
  text "PA1" at 525,-465 h45
  text "PB5" at 700,-465 h45
  text "GND" at -115,-500 h45 r270
  text "RX" at -15,-500 h45 r270
  text "TX" at 85,-500 h45 r270
  text "PD6" at -525,-565 h45
  text "PD3" at -350,-565 h45
  text "PC4" at 525,-565 h45
  text "PB0" at 700,-565 h45
  text "PD0" at -525,-665 h45
  text "PA9" at -350,-665 h45
  text "PB10" at 525,-665 h45
  text "PA7" at 700,-665 h45
  text "PB7" at -525,-765 h45
  text "PB9" at -350,-765 h45
  text "PB12" at 525,-765 h45
  text "PB13" at 700,-765 h45
  text "PE3" at -525,-865 h45
  text "PB8" at -350,-865 h45
  text "PC1" at 520,-865 h45
  text "PA2" at 700,-865 h45
  text "PB15" at -525,-965 h45
  text "PB4" at -350,-965 h45
  text "PA4" at 525,-965 h45
  text "PA5" at 700,-965 h45
  text "PB3" at -525,-1065 h45
  text "PG6" at -350,-1065 h45
  text "PA6" at 525,-1065 h45
  text "PC0" at 700,-1065 h45
  text "PE5" at -525,-1165 h45
  text "PA15" at -350,-1165 h45
  text "PD11" at 525,-1165 h45
  text "PF11" at 700,-1165 h45
  text "PB14" at -525,-1265 h45
  text "PC7" at -350,-1265 h45
  text "PF6" at 525,-1265 h45
  text "PD13" at 700,-1265 h45
  text "GND" at -525,-1365 h45
  text "PD12" at 525,-1365 h45
  text "GND" at 700,-1365 h45
  text "USB_DP1" at -350,-1370 h38
  text "GND" at -525,-1465 h45
  text "PB6" at 525,-1465 h45
  text "GND" at 700,-1465 h45
  text "USB_DM1" at -350,-1470 h38
Top Paste:
  text ".layer_Name" at 490,2135 h125
Top Solder:
  text ".layer_Name" at 485,2010 h125
Bottom Solder:
  text ".layer_Name" at 425,1900 h125
Board Outline:
  the board outline again, w10
Panel Outline:
  lines w10: 4100,1600 4100,4600 5900,4600 ; 4100,1600 5900,1600 ; 4100,1600 5900,1600 ; 4100,1600 4100,-1400 5900,-1400 ; 5900,-1400 5900,1600 ; 5900,-1400 7700,-1400 ; 5900,-1400 5900,1600 ; 5900,1600 5900,4600 ; 5900,1600 7700,1600 ; 5900,1600 5900,4600 ; 5900,1600 7700,1600 ; 5900,4600 7700,4600 ; 7700,-1400 7700,1600 ; 7700,-1400 9500,-1400 ; 7700,-1400 7700,1600 ; 7700,1600 7700,4600 ; 7700,1600 9500,1600 ; 7700,1600 7700,4600 ; 7700,1600 9500,1600 ; 7700,4600 9500,4600 ; 9500,-1400 9500,1600 ; 9500,-1400 11300,-1400 ; 9500,-1400 9500,1600 ; 9500,1600 9500,4600 ; 9500,1600 11300,1600 ; 9500,1600 9500,4600 ; 9500,1600 11300,1600 ; 9500,4600 11300,4600 ; 11300,-1400 11300,1600 ; 11300,-1400 13100,-1400 13100,1600 ; 11300,-1400 11300,1600 ; 11300,1600 11300,4600 ; 11300,1600 13100,1600 ; 11300,1600 11300,4600 ; 11300,1600 13100,1600 ; 11300,4600 13100,4600 13100,1600 ; 3800,-1700 13400,-1700 13400,4900 3800,4900 3800,-1700
  text "SUGGESTED ARRAY CONSTRUCTION" at 7334.49,5227.68 h100
  text "(BOARD FABRICATOR MAY SUGGEST ALTERNATIVES)" at 7434.49,5110.68 h60
Scoring Data:
  lines w5: 3800,-1400 13400,-1400 ; 3800,1600 13400,1600 ; 3800,4600 13400,4600 ; 4100,-1700 4100,4900 ; 5900,-1700 5900,4900 ; 7700,-1700 7700,4900 ; 9500,-1700 9500,4900 ; 11300,-1700 11300,4900 ; 13100,-1700 13100,4900
  text "SPACE ELEMENTS BY THE WIDTH OF THE SCORE LINE" at 7228,-2047 h60
Assembly Top:
  lines w5: 158,511 203,511 ; 263,511 308,511
  lines w10: -1584.46,2295.77 ccw(c-1534.46,2295.77) -1534.46,2245.77 1465.54,2245.77 ccw(c1465.54,2295.77) 1515.54,2295.77 1515.54,2595.77 ccw(c1465.54,2595.77) 1465.54,2645.77 -1534.46,2645.77 ccw(c-1534.46,2595.77) -1584.46,2595.77 -1584.46,2295.77
  text "ASSEMBLY CONTROL IDENTIFIER" at -1350,2475 h100
  text "OSD19001_BRK_X2_200318" at -1120,2310 h100
  text ".layer_Name" at -358.83,2142.22 h125
  text "NO INSTALLED" at -143,-761 h25
  text "COMPONENT" at -110,-800 h25
  text "RoHS COMPLIANT ASSEMBLY ONLY" at -900,-1630 h50
Body Outline Top:
  lines w5: -155,1375 160,1375 ; -138,1349.64 -138,1404.64 ; 138,1350 138,1405
Sheet:
  drawing of 327 lines, arcs and shapes, not listed
  text "1" at -2470.99,7304.42 h70
  text "2" at 854.68,7304.42 h70
  text "3" at 4184.68,7304.42 h70
  text "4" at 7519.68,7304.42 h70
  text "5" at 10844.68,7304.42 h70
  text "6" at 14179.68,7304.42 h70
  text "A" at -3992.32,5526.42 h70
  text "A" at 15707.68,5526.42 h70
  text "B" at -3992.32,1776.42 h70
  text "B" at 15707.68,1776.42 h70
  text "C" at -3992.32,-1973.58 h70
  text "C" at 15707.68,-1973.58 h70
  text "Layer" at 10685.04,-2762.32 h60
  text "Name" at 11094.95,-2762.32 h60
  text "Material" at 12024.7,-2762.32 h60
  text "Thickness" at 12884.47,-2762.32 h60
  text "Constant" at 13534.3,-2762.32 h60
  text "Board Layer Stack" at 14104.16,-2762.32 h60
  text "Top Overlay" at 11094.95,-2882.32 h60
  text "Top Solder" at 11094.95,-3002.32 h60
  text "Solder Resist" at 12024.7,-3002.32 h60
  text "0.70mil" at 12884.47,-3002.32 h60
  text "3.5" at 13534.3,-3002.32 h60
  text "1" at 10685.04,-3122.32 h60
  text "Top Layer" at 11094.95,-3122.32 h60
  text "Copper" at 12024.7,-3122.32 h60
  text "1.40mil" at 12884.47,-3122.32 h60
  text "Dielectric 1" at 11094.95,-3242.32 h60
  text "IPC-4101/126" at 12024.7,-3242.32 h60
  text "8.00mil" at 12884.47,-3242.32 h60
  text "4.2" at 13534.3,-3242.32 h60
  text "2" at 10685.04,-3362.32 h60
  text "L2 PLANE" at 11094.95,-3362.32 h60
  text "Copper" at 12024.7,-3362.32 h60
  text "0.70mil" at 12884.47,-3362.32 h60
  text "Dielectric 2" at 11094.95,-3482.32 h60
  text "IPC-4101/126" at 12024.7,-3482.32 h60
  text "39.00mil" at 12884.47,-3482.32 h60
  text "4.2" at 13534.3,-3482.32 h60
  text "3" at 10685.04,-3602.32 h60
  text "L3 PLANE" at 11094.95,-3602.32 h60
  text "Copper" at 12024.7,-3602.32 h60
  text "0.70mil" at 12884.47,-3602.32 h60
  text "Dielectric 3" at 11094.95,-3722.32 h60
  text "IPC-4101/126" at 12024.7,-3722.32 h60
  text "8.00mil" at 12884.47,-3722.32 h60
  text "4.2" at 13534.3,-3722.32 h60
  text "4" at 10685.04,-3842.32 h60
  text "Bottom Layer" at 11094.95,-3842.32 h60
  text "Copper" at 12024.7,-3842.32 h60
  text "1.40mil" at 12884.47,-3842.32 h60
  text "Bottom Solder" at 11094.95,-3962.32 h60
  text "Solder Resist" at 12024.7,-3962.32 h60
  text "0.70mil" at 12884.47,-3962.32 h60
  text "3.5" at 13534.3,-3962.32 h60
  text "Bottom Overlay" at 11094.95,-4082.32 h60
  text "LAYER THICKNESS APPROXIMATE - CONTROL OVERALL THICKNESS FIRST" at 10800,-4240 h125
  text "1.  4 layer printed circuit board, approximate 62 mil finished thickness" at 11042.16,-4459.4 h125
  text "2.  ENIG finish" at 11042.16,-4609.4 h125
  text "3.  5 mil trace and 5 mil space" at 11042.16,-4759.4 h125
  text "4.  RS-274x Gerber data provided" at 11042.16,-4909.4 h125
  text "5.  BLUE semi-gloss LPI or equivalent solder mask both sides" at 11042.16,-5059.4 h125
  text "6.  IMPORTANT:  Do not expand mask aperatures" at 11042.16,-5209.4 h125
  text "7.  Do not add copper or stamp logo to board" at 11042.16,-5359.4 h125
  text "8.  White silkscreen ledgend top and bottom sides" at 11034.68,-5510.58 h125
  text "9.  Do not expose copper over vias" at 11034.68,-5660.58 h125
  text "D" at -3992.32,-5723.58 h70
  text "D" at 15707.68,-5723.58 h70
  text "10. Fabricate in scored array of ten (10) boards, with 300 mil rails, similar to as shown" at 11025.99,-5806.82 h125
  text "11. Copper thieving and fabricator markings allowed in rails only" at 11025.99,-5951.82 h125
  text "12. Provide array Gerber files for approval" at 11030.99,-6096.82 h125
  text "Hole Definitions :" at 446.99,-6222.82 h125
  text "Hole sizes are finished hole size +/- 3 mil, except" at 1351.99,-6227.82 h125
  text "10 mil and 15 mil holes (vias) are actual drill size (+0/-size mil)" at 1350,-6350 h125
  text "DRAWING NUMBER:" at 11462.68,-6415.58 h60
  text ".ProjectDrawingNumber" at 12412.68,-6415.58 h60
  text "REVISION:" at 14537.68,-6415.58 h60
  text ".ProjectRevision" at 15087.68,-6415.58 h60
  text "and 35 mil holes are minimum finished hole size (+4/-0 mil)" at 1350,-6475 h125
  text "PRINT DATE:" at 11462.68,-6640.58 h60
  text ".Print_Date" at 12187.68,-6640.58 h60
  text "CAD FILE:" at 12912.68,-6640.58 h60
  text ".Pcb_File_Name_No_Path" at 13462.68,-6640.58 h116
  text ".ProjectCompanyName" at 11457.68,-6825.58 h75
  text ".ProjectAddress1" at 11452.68,-6935.58 h60
  text ".ProjectAddress2" at 11452.68,-7035.58 h60
  text ".ProjectCompanyPhone" at 11447.68,-7155.58 h60
  text "1" at -2470.99,-7395.58 h70
  text "2" at 854.68,-7395.58 h70
  text "3" at 4184.68,-7395.58 h70
  text "4" at 7519.68,-7395.58 h70
  text "5" at 10844.68,-7395.58 h70
Drill Drawing:
  circle w10: c605.2,-5472.4 r55.7
  lines w10: 549.5,-5778.76 605.2,-5750.91 660.91,-5778.76 633.06,-5723.05 660.91,-5667.35 605.2,-5695.2 549.5,-5667.35 577.35,-5723.05 549.5,-5778.76 ; 549.5,-5277.44 660.91,-5277.44 660.91,-5166.03 549.5,-5166.03 549.5,-5277.44 ; 549.5,-4998.93 577.35,-4998.93 605.2,-5026.78 633.06,-4998.93 660.91,-4998.93 633.06,-4971.08 660.91,-4943.23 633.06,-4943.23 605.2,-4915.38 577.35,-4943.23 549.5,-4943.23 577.35,-4971.08 549.5,-4998.93 ; 549.5,-4748.27 577.35,-4748.27 577.35,-4776.12 633.06,-4776.12 633.06,-4748.27 660.91,-4748.27 660.91,-4692.57 633.06,-4692.57 633.06,-4664.72 577.35,-4664.72 577.35,-4692.57 549.5,-4692.57 549.5,-4748.27 ; 549.5,-4414.06 660.91,-4414.06 605.2,-4525.46 549.5,-4414.06
  lines w15: 451.68,-5853.95 4423.49,-5853.95 ; 451.68,-4350 4423.49,-4350 ; 1350.76,-6104.61 1350.76,-4099.34 ; 2339.71,-6104.61 2339.71,-4099.34 ; 3524.41,-6104.61 3524.41,-4099.34 ; 451.68,-6104.61 4423.49,-6104.61 4423.49,-4099.34 451.68,-4099.34 451.68,-6104.61
  text "Symbol" at 602.08,-4274.8 h120.32
  text "Count" at 1425.95,-4274.8 h120.32
  text "Hole Size" at 2414.9,-4274.8 h120.32
  text "Plated" at 3599.61,-4274.8 h120.32
  text "137" at 1425.95,-4525.46 h100.26
  text "10.0mil" at 2414.9,-4525.46 h100.26
  text "PTH" at 3599.61,-4525.46 h100.26
  text "26" at 1425.95,-4776.12 h100.26
  text "15.0mil" at 2414.9,-4776.12 h100.26
  text "PTH" at 3599.61,-4776.12 h100.26
  text "2" at 1425.95,-5026.78 h100.26
  text "30.0mil" at 2414.9,-5026.78 h100.26
  text "PTH" at 3599.61,-5026.78 h100.26
  text "123" at 1425.95,-5277.44 h100.26
  text "35.0mil" at 2414.9,-5277.44 h100.26
  text "PTH" at 3599.61,-5277.44 h100.26
  text "3" at 1425.95,-5528.1 h100.26
  text "39.0mil" at 2414.9,-5528.1 h100.26
  text "PTH" at 3599.61,-5528.1 h100.26
  text "2" at 1425.95,-5778.76 h100.26
  text "43.0mil" at 2414.9,-5778.76 h100.26
  text "PTH" at 3599.61,-5778.76 h100.26
  text "293 Total" at 1425.95,-6029.42 h100.26

## Dimensions
9500,-1700 to 9300,-1900 on Scoring Data
-900,1500 to -900,-1500 on Sheet
-900,1500 to 900,1500 on Sheet